# EAGLE board power_board (EAGLE 9.5.1)
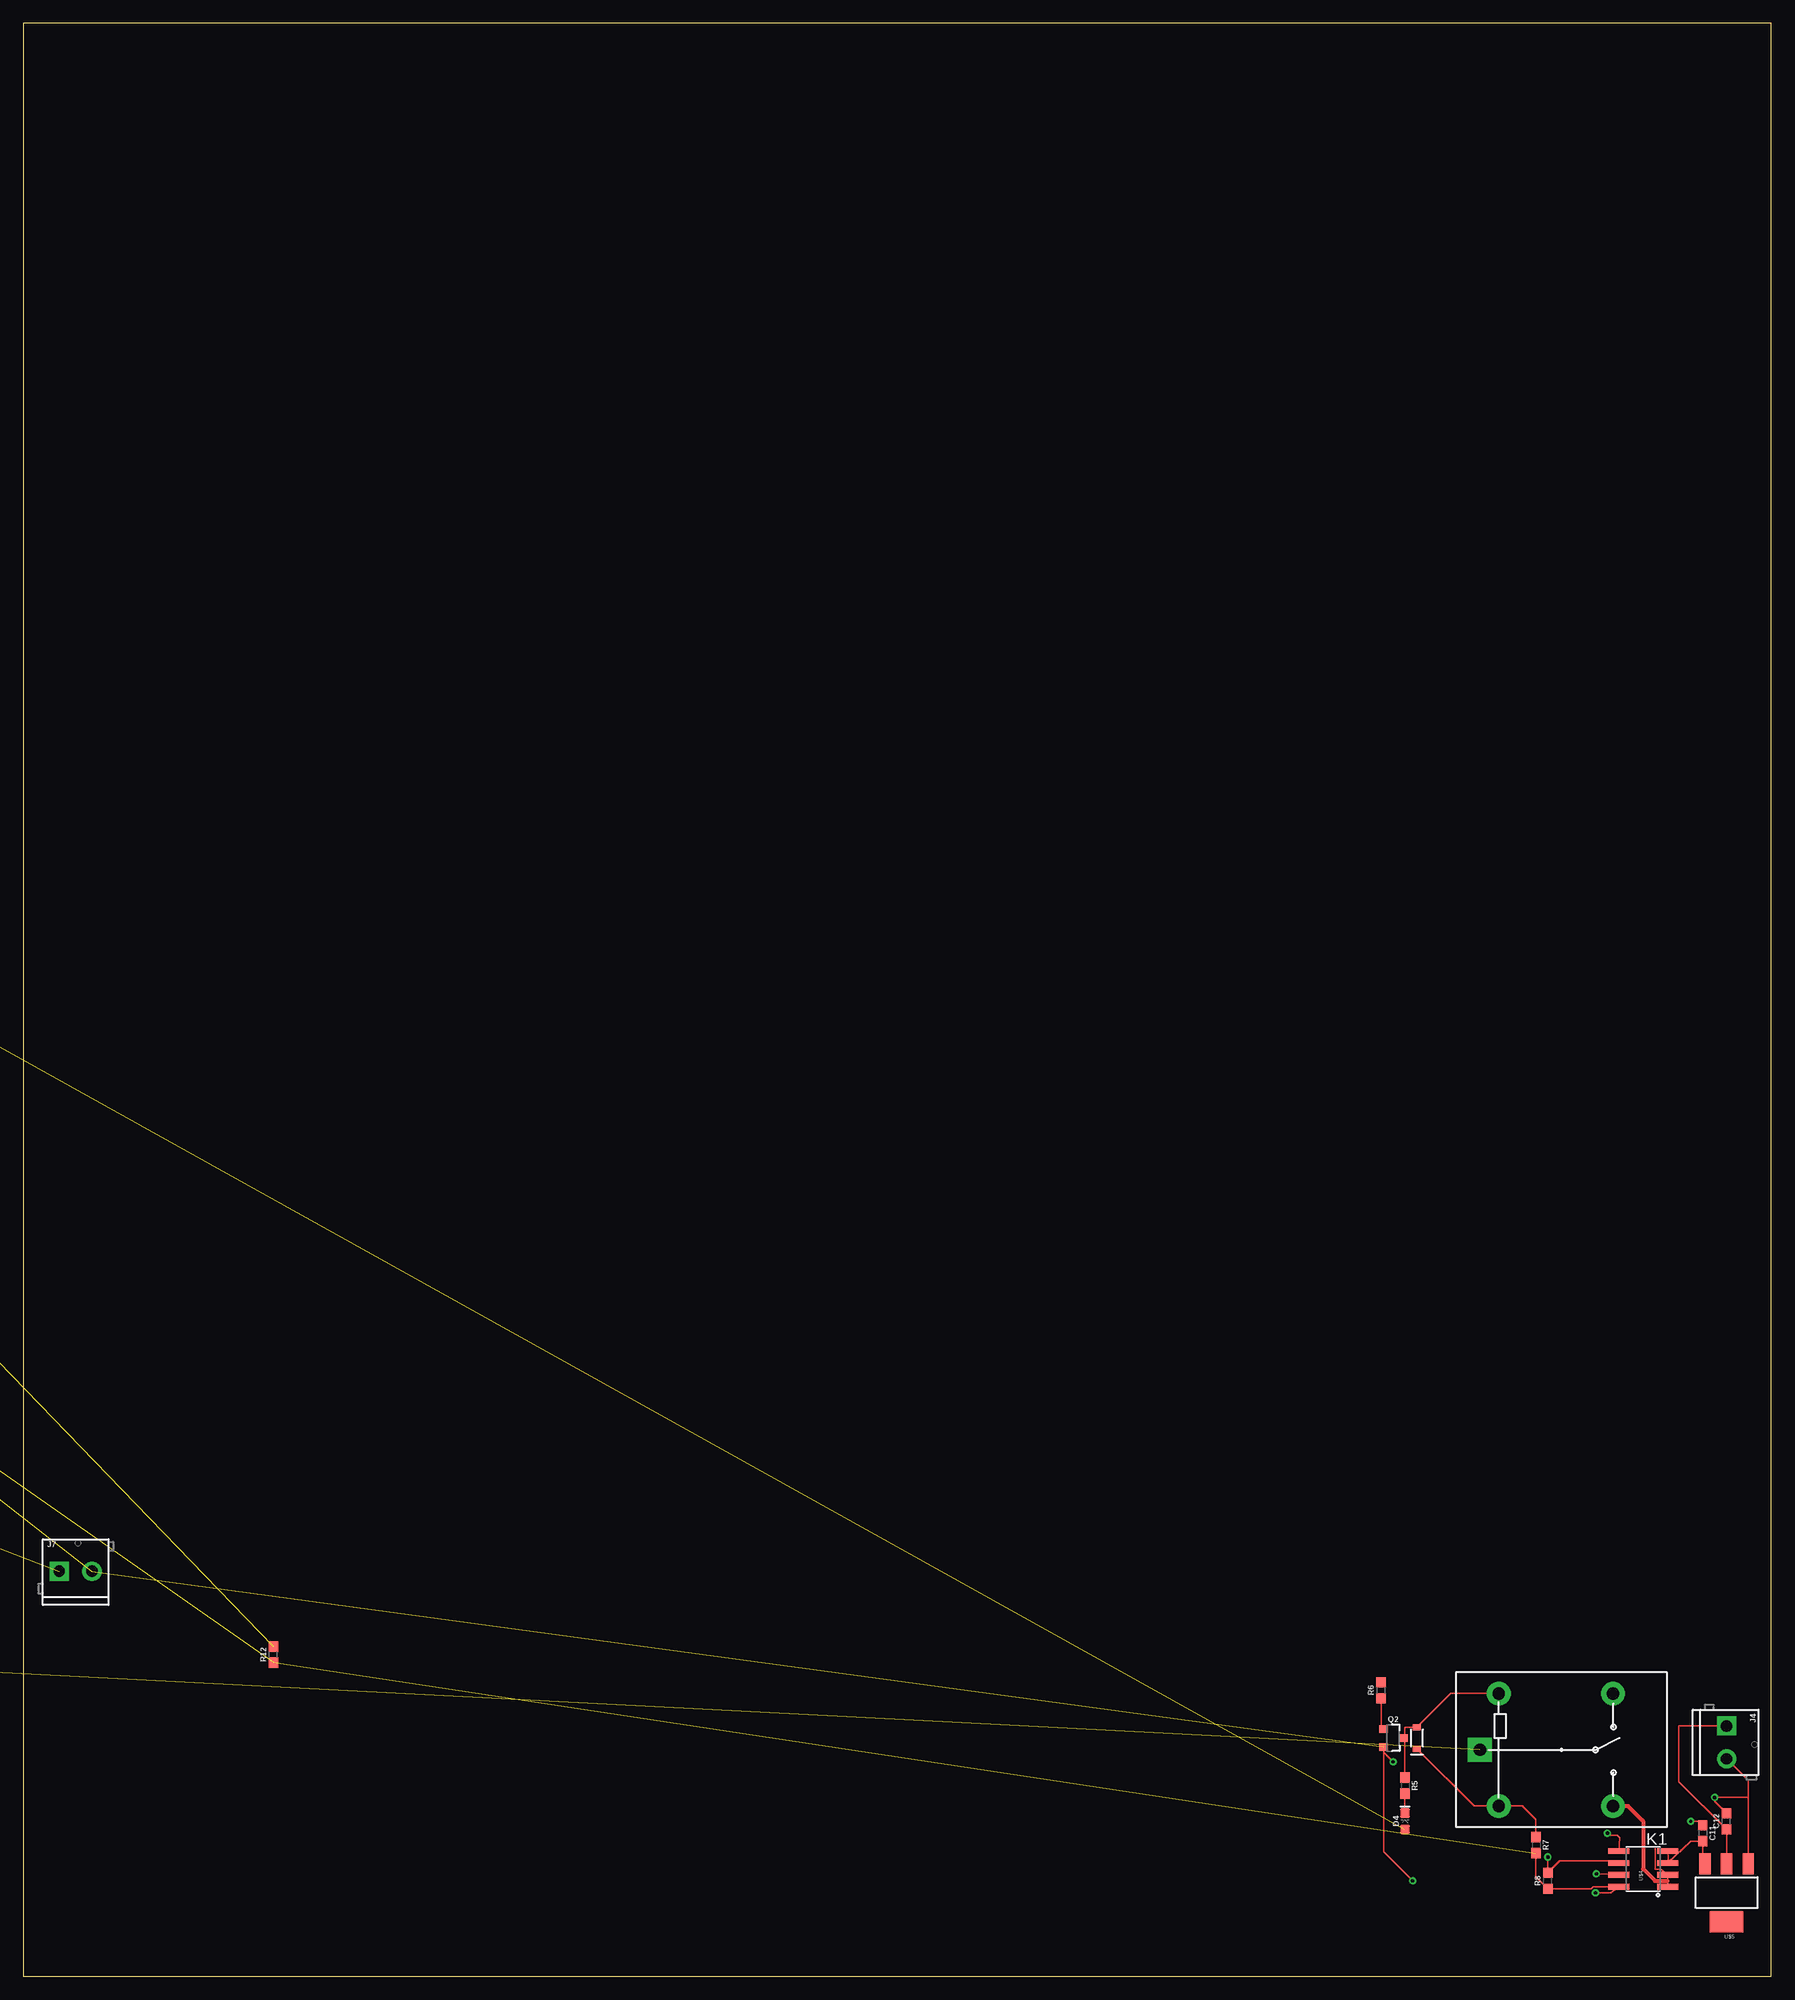
[diagram p0: board, top side]
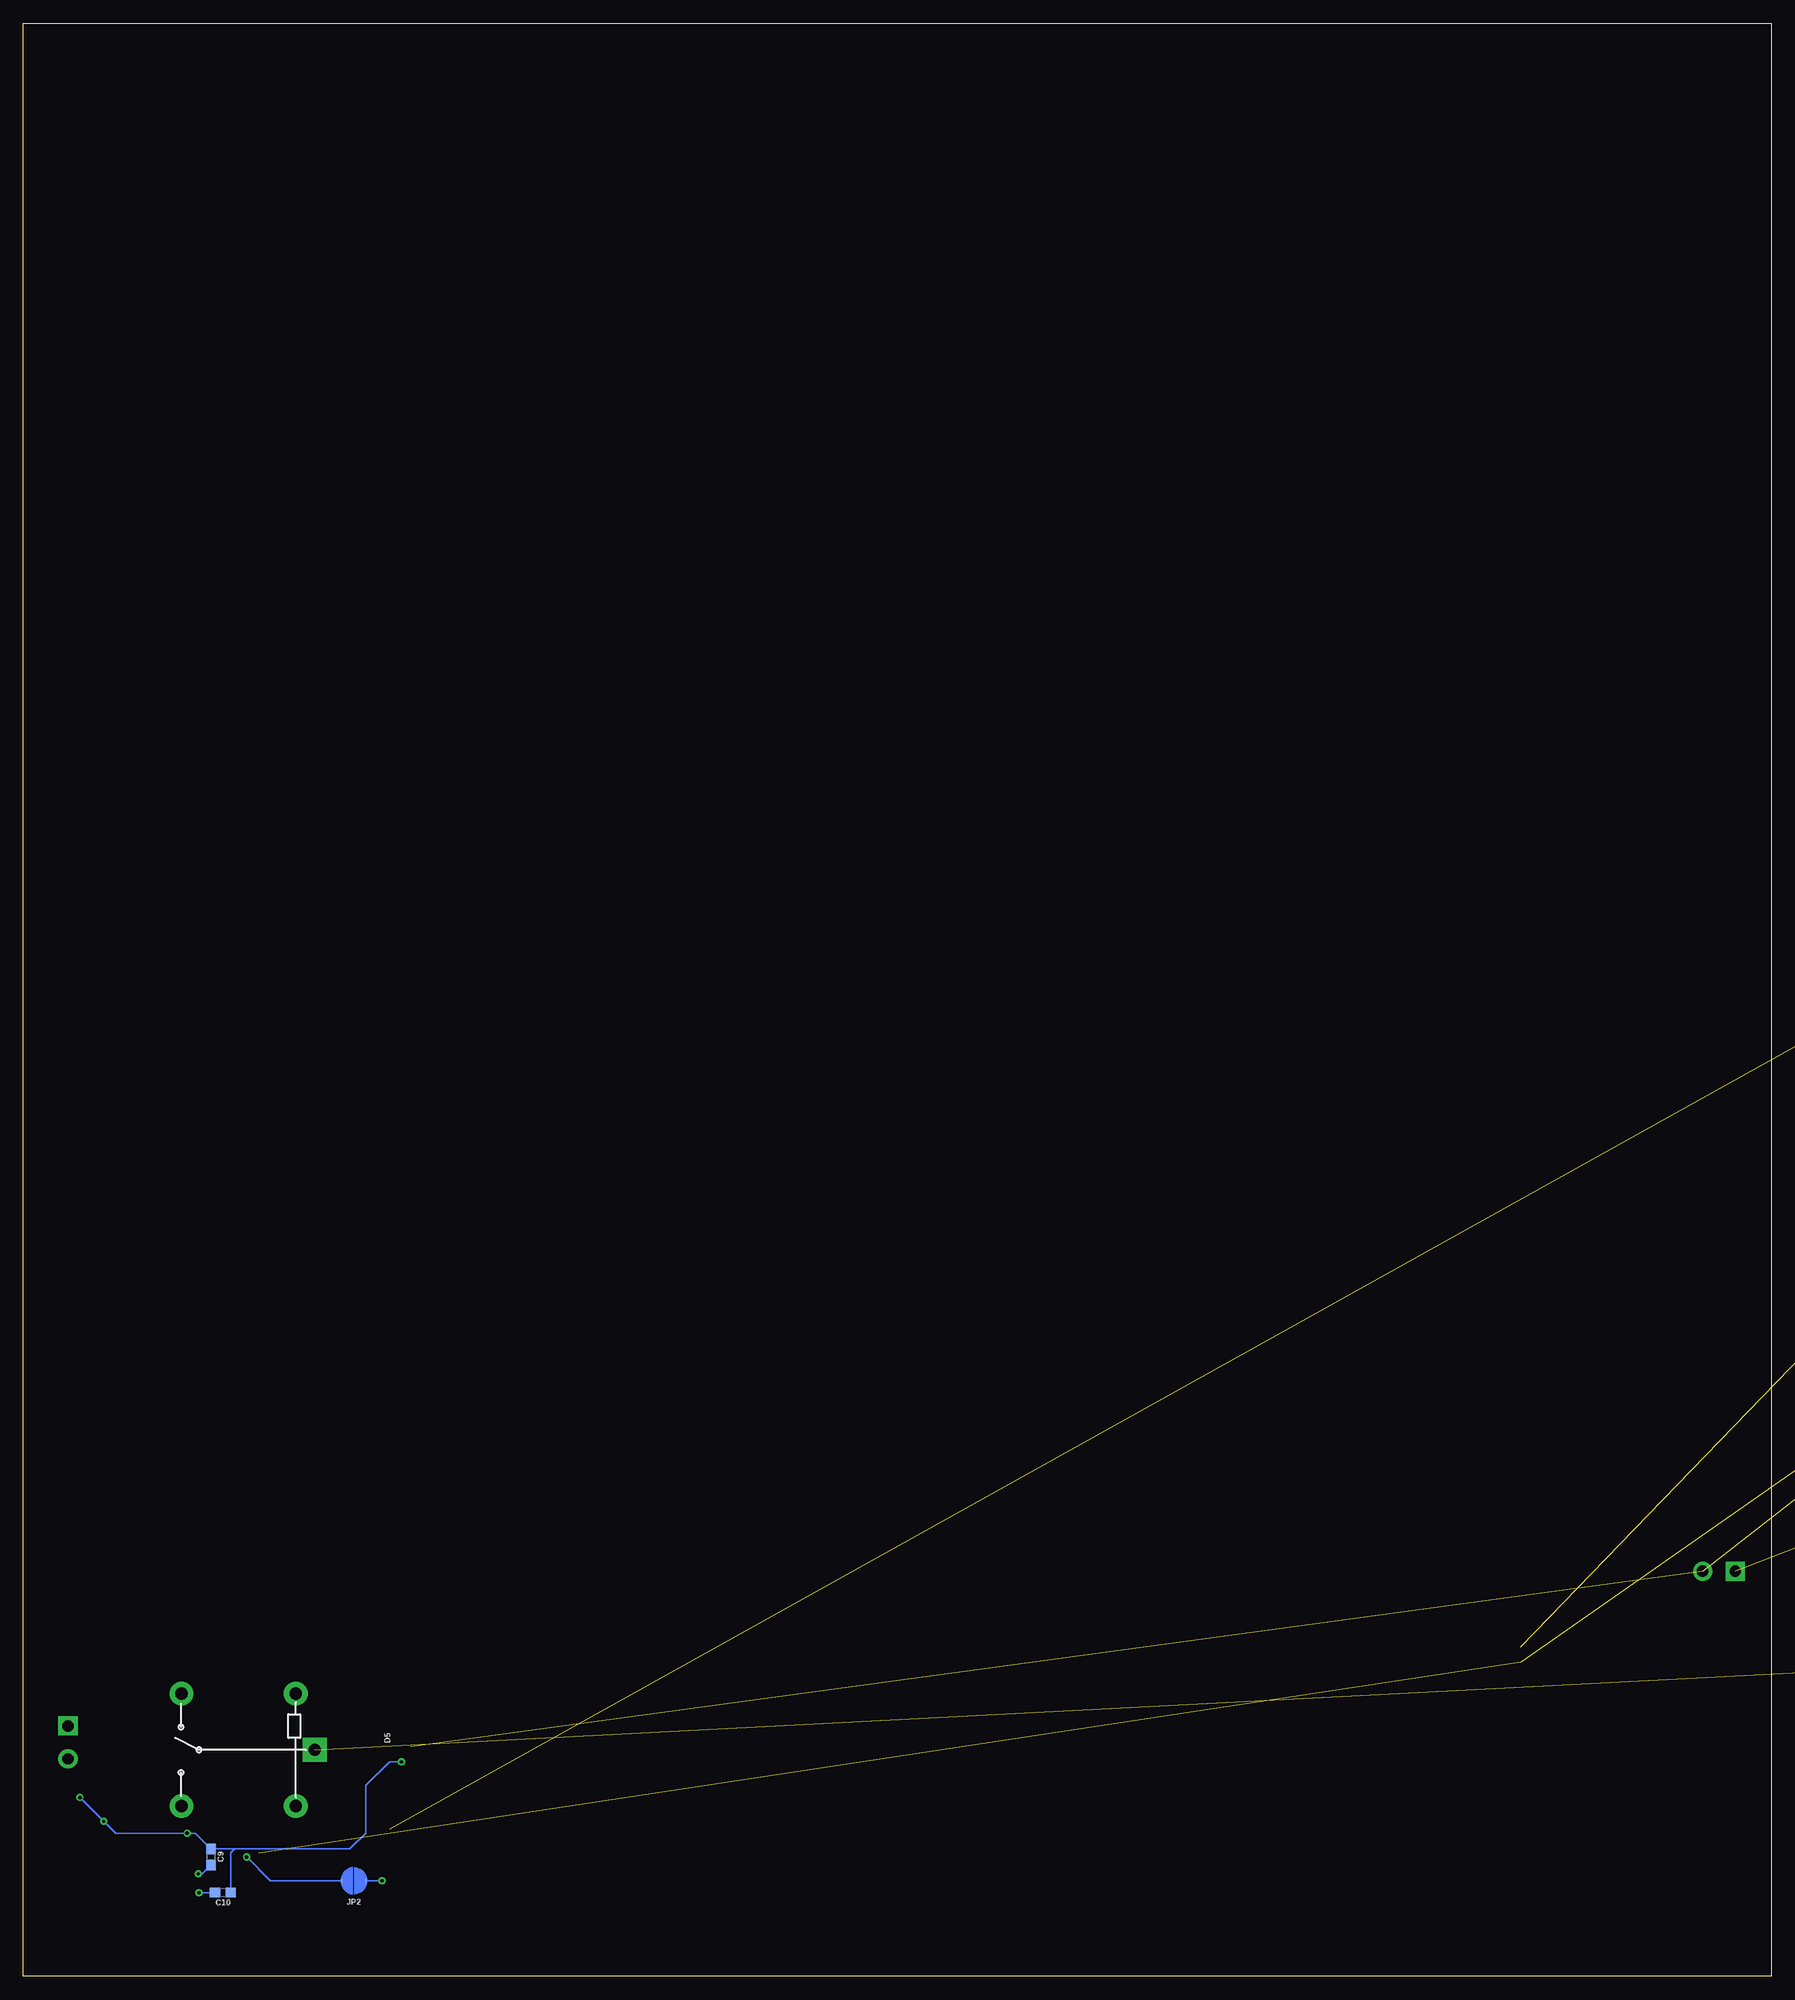
[diagram p1: board, bottom side, seen from below]

Size 186.36 x 208.27 mm. Coordinates in mm from the lower left corner, seen from the top.
Outline: 0,0 186.36,0 186.36,208.27 0,208.27 0,0
Copper layers (1*16): Top 0.035mm / dielectric 1.5mm / Bottom 0.035mm
Design rules "default": minimum track width 6mil, minimum drill 0.35mm, track to track 6mil, track to pad 6mil, pad to pad 6mil, via to via 6mil, smd to smd 6mil, copper to edge 40mil, drill to drill 6mil, minimum pad ring 10mil, minimum via ring 8mil, stop-mask expansion 4mil, vias tented up to drill 0mil, thermal gap 10mil

## Footprints (pad centres in the part's own frame; a part is rotated, then mirrored left to right if it is on the bottom)
0603 = smd 1.1 x 1: 1 -0.85,0; 2 0.85,0
0805 = smd 0.8 x 1.2: 1 -0.9,0; 2 0.9,0
LED-0603 = smd 1 x 1: A -0.877,0; C 0.877,0
SOD-323 = smd 0.63 x 0.83: A 1.15,0; C -1.15,0
PLCC-6-LED = smd 1.3 x 0.7: AB 1.475,1.1; AG 1.475,-1.1; AR 1.475,0; CB -1.475,1.1; CG -1.475,-1.1; CR -1.475,0
SCREWTERMINAL-3.5MM-2 = drill 1.2 pad 2.032 square: 1 0,0 | drill 1.2 pad 2.032: 2 3.5,0
1X01_2MM = drill 2 pad 3.302: 1 0,0
SMT-JUMPER_2_NO_NO-SILK_ROUND = smd 0.152 x 0.305: 1 -1.27,0; 2 1.27,0
RELAY_G5LE = drill 1.3 pad 2.54 square: 1 8.52,-0.005 | drill 1.3 pad 2.54: 2 6.52,5.995; 3 -5.68,5.995; 4 -5.68,-6.005; 5 6.52,-6.005
SOT23-3 = smd 0.8 x 0.9: 1 -0.95,-1; 2 0.95,-1; 3 0,1.1
TO-220-ALT = drill 1.016 long: GND 0,-3.81; IN -2.54,-3.81; OUT 2.54,-3.81 | hole 3.302: 0,11.176
TQFP-48 = smd 1.5 x 0.28: 1 -4.25,2.75; 2 -4.25,2.25; 3 -4.25,1.75; 4 -4.25,1.25; 5 -4.25,0.75; 6 -4.25,0.25; 7 -4.25,-0.25; 8 -4.25,-0.75; 9 -4.25,-1.25; 10 -4.25,-1.75; 11 -4.25,-2.25; 12 -4.25,-2.75; 25 4.25,-2.75; 26 4.25,-2.25; 27 4.25,-1.75; 28 4.25,-1.25; 29 4.25,-0.75; 30 4.25,-0.25; 31 4.25,0.25; 32 4.25,0.75; 33 4.25,1.25; 34 4.25,1.75; 35 4.25,2.25; 36 4.25,2.75 | smd 0.28 x 1.5: 13 -2.75,-4.25; 14 -2.25,-4.25; 15 -1.75,-4.25; 16 -1.25,-4.25; 17 -0.75,-4.25; 18 -0.25,-4.25; 19 0.25,-4.25; 20 0.75,-4.25; 21 1.25,-4.25; 22 1.75,-4.25; 23 2.25,-4.25; 24 2.75,-4.25; 37 2.75,4.25; 38 2.25,4.25; 39 1.75,4.25; 40 1.25,4.25; 41 0.75,4.25; 42 0.25,4.25; 43 -0.25,4.25; 44 -0.75,4.25; 45 -1.25,4.25; 46 -1.75,4.25; 47 -2.25,4.25; 48 -2.75,4.25
NINA112-42 = smd 0.7 x 1.15: 1 -4.5,-4.125; 2 -3.5,-4.125; 3 -2.5,-4.125; 4 -1.5,-4.125; 5 -0.5,-4.125; 6 0.5,-4.125; 7 1.5,-4.125; 8 2.5,-4.125; 9 3.5,-4.125; 10 4.5,-4.125; 16 4.5,4.125; 17 3.5,4.125; 18 2.5,4.125; 19 1.5,4.125; 20 0.5,4.125; 21 -0.5,4.125; 22 -1.5,4.125; 23 -2.5,4.125; 24 -3.5,4.125; 25 -4.5,4.125 | smd 1.15 x 0.7: 11 4.425,-2; 12 4.425,-1; 13 4.425,0; 14 4.425,1; 15 4.425,2; 26 -4.425,2; 27 -4.425,1; 28 -4.425,0; 29 -4.425,-1; 30 -4.425,-2 | smd 0.7 x 0.7: 31 -1.725,-0.575; 32 -1.725,0.575; 33 -0.575,-1.725; 34 -0.575,-0.575; 35 -0.575,0.575; 36 -0.575,1.725; 37 0.575,-0.575; 38 0.575,0.575; 39 1.725,-1.725; 40 1.725,-0.575; 41 1.725,0.575; 42 1.725,1.725
SO16 = smd 0.6 x 1.2: 1 -4.445,-2.8; 2 -3.175,-2.8; 3 -1.905,-2.8; 4 -0.635,-2.8; 5 0.635,-2.8; 6 1.905,-2.8; 7 3.175,-2.8; 8 4.445,-2.8; 9 4.445,2.8; 10 3.175,2.8; 11 1.905,2.8; 12 0.635,2.8; 13 -0.635,2.8; 14 -1.905,2.8; 15 -3.175,2.8; 16 -4.445,2.8
SO08 = smd 0.61 x 2.21: 1 -1.905,-2.616; 2 -0.635,-2.616; 3 0.635,-2.616; 4 1.905,-2.616; 5 1.905,2.616; 6 0.635,2.616; 7 -0.635,2.616; 8 -1.905,2.616
SOT223 = smd 1.219 x 2.235: 1 -2.311,-3.099; 2 0,-3.099; 3 2.311,-3.099 | smd 3.6 x 2.2: 4 0,3.099

## Placement (x,y rotation side)
C1  1nF  [0603]  -59.69,95.25 0 top  (outside the outline)
C2  0.1uF  [0603]  -63.5,95.25 0 top  (outside the outline)
C3  10uF  [0603]  -67.31,95.25 0 top  (outside the outline)
C4  10uF  [0603]  -71.12,95.25 0 top  (outside the outline)
C5  10uF  [0603]  -74.93,95.25 0 top  (outside the outline)
C6  10uF  [0603]  -78.74,95.25 0 top  (outside the outline)
C7  0.33µF  [0805]  -86.36,88.9 0 top  (outside the outline)
C8  0.1uF  [0603]  -82.55,95.25 0 top  (outside the outline)
C9  1nF  [0603]  166.37,12.7 270 bottom
C10  0.1uF  [0603]  165.1,8.89 180 bottom
C11  10uF  [0603]  179.07,15.24 270 top
C12  10uF  [0603]  181.61,16.51 90 top
C13  1nF  [0603]  -101.6,95.25 0 top  (outside the outline)
C14  0.1uF  [0603]  -105.41,95.25 0 top  (outside the outline)
C15  10uF  [0603]  -15.24,99.06 0 top  (outside the outline)
C16  10uF  [0603]  -19.05,99.06 0 top  (outside the outline)
C17  1nF  [0603]  -22.86,99.06 0 top  (outside the outline)
C18  0.1uF  [0603]  -26.67,99.06 0 top  (outside the outline)
C19  1nF  [0603]  -30.48,99.06 0 top  (outside the outline)
C20  0.1uF  [0603]  -34.29,99.06 0 top  (outside the outline)
C21  1nF  [0603]  -38.1,99.06 0 top  (outside the outline)
C22  0.1uF  [0603]  -41.91,99.06 0 top  (outside the outline)
C23  10uF  [0603]  -45.72,99.06 0 top  (outside the outline)
C24  10uF  [0603]  -49.53,99.06 0 top  (outside the outline)
C25  1nF  [0603]  -53.34,99.06 0 top  (outside the outline)
C26  0.1uF  [0603]  -57.15,99.06 0 top  (outside the outline)
C27  1nF  [0603]  -60.96,99.06 0 top  (outside the outline)
C28  0.1uF  [0603]  -64.77,99.06 0 top  (outside the outline)
D1  Red  [LED-0603]  -95.25,102.87 0 top  (outside the outline)
D2  1A/23V/620mV  [SOD-323]  -91.44,88.9 0 top  (outside the outline)
D3  RGB  [PLCC-6-LED]  -31.75,90.17 0 top  (outside the outline)
D4  Red  [LED-0603]  147.32,16.51 90 top
D5  1A/23V/620mV  [SOD-323]  148.59,25.4 90 top
D6  Red  [LED-0603]  -102.87,102.87 0 top  (outside the outline)
D7  1A/23V/620mV  [SOD-323]  -16.51,95.25 0 top  (outside the outline)
D8  Red  [LED-0603]  -106.68,102.87 0 top  (outside the outline)
D9  1A/23V/620mV  [SOD-323]  -24.13,95.25 0 top  (outside the outline)
D10  Red  [LED-0603]  -15.24,106.68 0 top  (outside the outline)
D11  1A/23V/620mV  [SOD-323]  -31.75,95.25 0 top  (outside the outline)
D12  Red  [LED-0603]  -19.05,106.68 0 top  (outside the outline)
D13  1A/23V/620mV  [SOD-323]  -39.37,95.25 0 top  (outside the outline)
D14  Red  [LED-0603]  -22.86,106.68 0 top  (outside the outline)
D15  1A/23V/620mV  [SOD-323]  -46.99,95.25 0 top  (outside the outline)
D16  Red  [LED-0603]  -26.67,106.68 0 top  (outside the outline)
D17  1A/23V/620mV  [SOD-323]  -54.61,95.25 0 top  (outside the outline)
J1  [SCREWTERMINAL-3.5MM-2]  -78.74,68.58 0 top  (outside the outline)
J2  [1X01_2MM]  -77.47,88.9 0 top  (outside the outline)
J3  [1X01_2MM]  -82.55,88.9 0 top  (outside the outline)
J4  [SCREWTERMINAL-3.5MM-2]  181.61,26.67 270 top
J5  [SCREWTERMINAL-3.5MM-2]  -96.52,68.58 0 top  (outside the outline)
J6  [SCREWTERMINAL-3.5MM-2]  -105.41,68.58 0 top  (outside the outline)
J7  [SCREWTERMINAL-3.5MM-2]  3.81,43.18 0 top
J8  [SCREWTERMINAL-3.5MM-2]  -27.94,77.47 0 top  (outside the outline)
J9  [SCREWTERMINAL-3.5MM-2]  -36.83,77.47 0 top  (outside the outline)
J10  [SCREWTERMINAL-3.5MM-2]  -45.72,77.47 0 top  (outside the outline)
JP1  JUMPER-SMT_2_NO_NO-SILK_ROUND  [SMT-JUMPER_2_NO_NO-SILK_ROUND]  -71.12,77.47 0 top  (outside the outline)
JP2  JUMPER-SMT_2_NO_NO-SILK_ROUND  [SMT-JUMPER_2_NO_NO-SILK_ROUND]  151.13,10.16 180 bottom
JP3  JUMPER-SMT_2_NO_NO-SILK_ROUND  [SMT-JUMPER_2_NO_NO-SILK_ROUND]  -21.59,83.82 0 top  (outside the outline)
JP4  JUMPER-SMT_2_NO_NO-SILK_ROUND  [SMT-JUMPER_2_NO_NO-SILK_ROUND]  -38.1,83.82 0 top  (outside the outline)
JP5  JUMPER-SMT_2_NO_NO-SILK_ROUND  [SMT-JUMPER_2_NO_NO-SILK_ROUND]  -54.61,83.82 0 top  (outside the outline)
JP6  JUMPER-SMT_2_NO_NO-SILK_ROUND  [SMT-JUMPER_2_NO_NO-SILK_ROUND]  -71.12,83.82 0 top  (outside the outline)
JP7  JUMPER-SMT_2_NO_NO-SILK_ROUND  [SMT-JUMPER_2_NO_NO-SILK_ROUND]  -87.63,83.82 0 top  (outside the outline)
JP8  JUMPER-SMT_2_NO_NO-SILK_ROUND  [SMT-JUMPER_2_NO_NO-SILK_ROUND]  -21.59,90.17 0 top  (outside the outline)
K1  RELAY-SPDT  [RELAY_G5LE]  163.83,24.13 180 top
K2  RELAY-SPDT  [RELAY_G5LE]  -48.26,11.43 0 top  (outside the outline)
K3  RELAY-SPDT  [RELAY_G5LE]  -72.39,11.43 0 top  (outside the outline)
K4  RELAY-SPDT  [RELAY_G5LE]  -96.52,11.43 0 top  (outside the outline)
K5  RELAY-SPDT  [RELAY_G5LE]  -24.13,33.02 0 top  (outside the outline)
K6  RELAY-SPDT  [RELAY_G5LE]  -48.26,33.02 0 top  (outside the outline)
K7  RELAY-SPDT  [RELAY_G5LE]  -72.39,33.02 0 top  (outside the outline)
K8  RELAY-SPDT  [RELAY_G5LE]  -96.52,33.02 0 top  (outside the outline)
Q1  600mA/40V  [SOT23-3]  -36.83,90.17 0 top  (outside the outline)
Q2  600mA/40V  [SOT23-3]  146.05,25.4 270 top
Q3  600mA/40V  [SOT23-3]  -46.99,90.17 0 top  (outside the outline)
Q4  600mA/40V  [SOT23-3]  -52.07,90.17 0 top  (outside the outline)
Q5  600mA/40V  [SOT23-3]  -57.15,90.17 0 top  (outside the outline)
Q6  600mA/40V  [SOT23-3]  -62.23,90.17 0 top  (outside the outline)
Q7  600mA/40V  [SOT23-3]  -67.31,90.17 0 top  (outside the outline)
Q8  600mA/40V  [SOT23-3]  -72.39,90.17 0 top  (outside the outline)
R1  330  [0603]  -68.58,99.06 0 top  (outside the outline)
R2  330  [0603]  -72.39,99.06 0 top  (outside the outline)
R3  10  [0603]  -76.2,99.06 0 top  (outside the outline)
R4  4.7k  [0603]  -80.01,99.06 0 top  (outside the outline)
R5  330  [0603]  147.32,20.32 270 top
R6  330  [0603]  144.78,30.48 90 top
R7  10  [0603]  161.29,13.97 270 top
R8  4.7k  [0603]  162.56,10.16 90 top
R9  330  [0603]  -99.06,99.06 0 top  (outside the outline)
R10  330  [0603]  -102.87,99.06 0 top  (outside the outline)
R11  10  [0603]  -106.68,99.06 0 top  (outside the outline)
R12  4.7k  [0603]  26.67,34.29 90 top
R13  330  [0603]  -19.05,102.87 0 top  (outside the outline)
R14  330  [0603]  -22.86,102.87 0 top  (outside the outline)
R15  10  [0603]  -26.67,102.87 0 top  (outside the outline)
R16  4.7k  [0603]  -30.48,102.87 0 top  (outside the outline)
R17  330  [0603]  -34.29,102.87 0 top  (outside the outline)
R18  330  [0603]  -38.1,102.87 0 top  (outside the outline)
R19  10  [0603]  -41.91,102.87 0 top  (outside the outline)
R20  4.7k  [0603]  -45.72,102.87 0 top  (outside the outline)
R21  330  [0603]  -49.53,102.87 0 top  (outside the outline)
R22  330  [0603]  -53.34,102.87 0 top  (outside the outline)
R23  10  [0603]  -57.15,102.87 0 top  (outside the outline)
R24  4.7k  [0603]  -60.96,102.87 0 top  (outside the outline)
R25  330  [0603]  -64.77,102.87 0 top  (outside the outline)
R26  330  [0603]  -68.58,102.87 0 top  (outside the outline)
R27  10  [0603]  -72.39,102.87 0 top  (outside the outline)
R28  4.7k  [0603]  -76.2,102.87 0 top  (outside the outline)
R29  330  [0603]  -80.01,102.87 0 top  (outside the outline)
R30  330  [0603]  -83.82,102.87 0 top  (outside the outline)
R31  10  [0603]  -87.63,102.87 0 top  (outside the outline)
R32  4.7k  [0603]  -91.44,102.87 0 top  (outside the outline)
U1  [TO-220-ALT]  -46.99,49.53 0 top  (outside the outline)
U2  ATSAMD21G-A  [TQFP-48]  -74.93,50.8 0 top  (outside the outline)
U3  NINA-B112  [NINA112-42]  -62.23,52.07 0 top  (outside the outline)
U4  SN74HC595D  [SO16]  -55.88,77.47 0 top  (outside the outline)
U$1  ACS712  [SO08]  -25.4,68.58 0 top  (outside the outline)
U$2  3.3V Voltage Regulator  [SOT223]  -86.36,48.26 0 top  (outside the outline)
U$3  3.3V Voltage Regulator  [SOT223]  -95.25,48.26 0 top  (outside the outline)
U$4  ACS712  [SO08]  172.72,11.43 90 top
U$5  3.3V Voltage Regulator  [SOT223]  181.61,8.89 180 top
U$6  ACS712  [SO08]  -38.1,68.58 0 top  (outside the outline)
U$7  3.3V Voltage Regulator  [SOT223]  -19.05,68.58 0 top  (outside the outline)
U$8  ACS712  [SO08]  -44.45,68.58 0 top  (outside the outline)
U$9  ACS712  [SO08]  -50.8,68.58 0 top  (outside the outline)
U$10  ACS712  [SO08]  -57.15,68.58 0 top  (outside the outline)
U$11  3.3V Voltage Regulator  [TO-220-ALT]  -35.56,49.53 0 top  (outside the outline)
U$12  ACS712  [SO08]  -63.5,68.58 0 top  (outside the outline)
U$13  ACS712  [SO08]  -69.85,68.58 0 top  (outside the outline)

## Library data of the parts
C1 C9 C13 C17 C19 C21 C25 C27 = SparkFun-Capacitors; PROD_ID: CAP-07886
C2 C8 C10 C14 C18 C20 C22 C26 C28 = SparkFun-Capacitors; PROD_ID: CAP-00810
C3-C6 C11 C12 C15 C16 C23 C24 = SparkFun-Capacitors; PROD_ID: CAP-11015
C7 = SparkFun-Capacitors; PROD_ID: CAP-08469
D1 D4 D6 D8 D10 D12 D14 D16 = SparkFun-LED; PROD_ID: DIO-11154
D2 D5 D7 D9 D11 D13 D15 D17 = SparkFun-DiscreteSemi; PROD_ID: DIO-11623
D3 = SparkFun-LED; PROD_ID: DIO-12113
J1 J4-J10 = SparkFun-Connectors; PROD_ID: CONN-08399
J2 J3 = SparkFun-Connectors
JP1-JP8 = SparkFun-Jumpers
K1-K8 = SparkFun-Electromechanical; PROD_ID: COMP-14214
Q1-Q8 = SparkFun-DiscreteSemi; PROD_ID: TRANS-08049
R1 R2 R5 R6 R9 R10 R13 R14 R17 R18 R21 R22 R25 R26 R29 R30 = SparkFun-Resistors; PROD_ID: RES-00818
R3 R7 R11 R15 R19 R23 R27 R31 = SparkFun-Resistors; PROD_ID: RES-12581
R4 R8 R12 R16 R20 R24 R28 R32 = SparkFun-Resistors; PROD_ID: RES-07857
U1 U$11 = SparkFun-IC-Power; PROD_ID: VREG-08450; SF_ID: COM-00107
U2 = SparkFun-IC-Microcontroller; PROD_ID: IC-13064
U3 = ubloxLib
U4 = SparkFun-IC-Logic; PROD_ID: IC-07875
U$1 U$4 U$6 U$8-U$10 U$12 U$13 = SparkFun-Sensors; PROD_ID: IC-08964
U$2 U$3 U$5 U$7 = SparkFun-IC-Power; PROD_ID: VREG-13917

## Nets
3.3V: C6.1 D1.A D4.A D6.A D8.A D10.A D12.A D14.A D16.A U$3.2
5V: C2.2 C8.1 C10.2 C14.2 C18.2 C20.2 C22.2 C26.2 C28.2 R3.2 R4.1 R7.2 R8.1 R11.2 R12.1 R15.2 R16.1 R19.2 R20.1 R23.2 R24.1 R27.2 R28.1 R31.2 R32.1 U1.OUT U$1.8 U$4.8 U$6.8 U$8.8 U$9.8 U$10.8 U$12.8 U$13.8
12V: C5.2 C7.1 J2.1 K1.1 K2.1 K3.1 K4.1 K5.1 K6.1 K7.1 K8.1 U1.IN U$3.3
CTRL_1: R2.2
CTRL_2: R6.2
CTRL_4: R18.2
CTRL_5: R14.2
CTRL_6: R26.2
CTRL_7: R30.2
CTRL_8: R10.2 R22.2
CUR_1: C1.2 U$1.7
CUR_2: C9.2 U$4.7
CUR_3: C13.2 U$6.7
CUR_5: C17.2 U$8.7
CUR_6: C25.2 U$12.7
CUR_7: C21.2 C27.2 U$10.7 U$13.7
CUR_8: C19.2 U$9.7
GND: C1.1 C2.1 C3.1 C4.2 C5.1 C6.2 C7.2 C8.2 C9.1 C10.1 C11.1 C12.2 C13.1 C14.1 C15.1 C16.2 C17.1 C18.1 C19.1 C20.1 C21.1 C22.1 C23.1 C24.2 C25.1 C26.1 C27.1 C28.1 J1.2 J3.1 J4.2 J5.2 J6.2 J7.2 J8.2 J9.2 J10.2 JP1.1 JP2.1 JP3.1 JP4.1 JP5.1 JP6.1 JP7.1 JP8.1 Q1.2 Q2.2 Q3.2 Q4.2 Q5.2 Q6.2 Q7.2 Q8.2 U1.GND U3.6 U3.12 U3.14 U3.26 U3.30 U3.31 U3.32 U3.33 U3.34 U3.35 U3.36 U3.37 U3.38 U3.39 U3.40 U3.41 U3.42 U4.8 U$1.5 U$2.1 U$3.1 U$4.5 U$5.1 U$6.5 U$7.1 U$8.5 U$9.5 U$10.5 U$11.GND U$12.5 U$13.5
N$1: K2.3 U$1.1 U$1.2
N$2: C3.2 U$1.3 U$1.4 U$2.3
N$3: C4.1 J1.1 U$2.2
N$4: D2.A K2.5 Q1.3 R1.1
N$5: D2.C K2.2 R3.1
N$6: D1.C R1.2
N$7: JP1.2 R4.2 U$1.6
N$8: D5.A K1.5 Q2.3 R5.1
N$9: Q1.1 R2.1
N$10: D5.C K1.2 R7.1
N$11: D4.C R5.2
N$12: Q2.1 R6.1
N$13: C11.2 U$4.3 U$4.4 U$5.3
N$14: K1.3 U$4.1 U$4.2
N$15: JP2.2 R8.2 U$4.6
N$16: C12.1 J4.1 U$5.2
N$17: D7.A K3.5 Q3.3 R9.1
N$18: D7.C K3.2 R11.1
N$19: D6.C R9.2
N$20: Q3.1 R10.1
N$21: C15.2 U$6.3 U$6.4 U$7.3
N$22: K3.3 U$6.1 U$6.2
N$23: JP3.2 R12.2 U$6.6
N$24: C16.1 J5.1 U$7.2
N$25: D9.A K4.5 Q4.3 R13.1
N$26: J7.1 U$10.3 U$10.4
N$27: D9.C K4.2 R15.1
N$28: D8.C R13.2
N$29: Q4.1 R14.1
N$30: K4.3 U$8.1 U$8.2
N$31: JP4.2 R16.2 U$8.6
N$32: J6.1 U$8.3 U$8.4
N$33: D11.A K5.5 Q5.3 R17.1
N$34: D11.C K5.2 R19.1
N$35: D10.C R17.2
N$36: Q5.1 R18.1
N$37: D13.A K6.5 Q6.3 R21.1
N$38: K5.3 U$10.1 U$10.2
N$39: JP5.2 R20.2 U$10.6
N$40: D13.C K6.2 R23.1
N$41: D12.C R21.2
N$42: Q6.1 R22.1
N$43: C23.2 U$9.3 U$9.4 U$11.IN
N$44: K6.3 U$9.1 U$9.2
N$45: JP6.2 R24.2 U$9.6
N$46: C24.1 J8.1 U$11.OUT
N$47: D15.A K7.5 Q7.3 R25.1
N$48: D15.C K7.2 R27.1
N$49: D14.C R25.2
N$50: Q7.1 R26.1
N$51: K7.3 U$12.1 U$12.2
N$52: JP7.2 R28.2 U$12.6
N$53: J9.1 U$12.3 U$12.4
N$54: D17.A K8.5 Q8.3 R29.1
N$55: D17.C K8.2 R31.1
N$56: D16.C R29.2
N$57: Q8.1 R30.1
N$58: K8.3 U$13.1 U$13.2
N$59: JP8.2 R32.2 U$13.6
N$60: J10.1 U$13.3 U$13.4
VCC: U3.10 U4.16
VCC_IO: U3.9

## Tracks (layer width: path | path; a pad name or v marks a point on that pad's centre or on a via)
3.3V  (9 unrouted)
5V  (via drill 0.35)  (30 unrouted)
  Top 0.152: 162.9,9.65 R8.1 | R8.1 161.29,10.58 R7.2 | R8.1 167.2,9.31 167.39,9.5 169.86,9.5 U$4.8 169.26,8.89 v167.64,8.89
  Bottom 0.152: C10.2 v167.64,8.89
12V  (12 unrouted)
CTRL_8  (1 unrouted)
CUR_1  (1 unrouted)
CUR_2  (via drill 0.35)
  Top 0.152: U$4.7 v167.73,10.92
  Bottom 0.152: v167.73,10.92 167.3,10.92 C9.2
CUR_3  (1 unrouted)
CUR_5  (1 unrouted)
CUR_6  (1 unrouted)
CUR_7  (3 unrouted)
CUR_8  (1 unrouted)
GND  (via drill 0.35)  (76 unrouted)
  Top 0.152: U$4.5 170.2,14.73 169.93,14.99 169.16,14.99 v168.91,15.24 | v146.05,22.86 145.05,23.86 Q2.2 145.05,13.24 v148.13,10.16 | C11.1 178.65,16.51 v177.8,16.51 | C12.2 180.34,18.63 v180.34,19.05 183.92,19.05 | U$5.1 183.92,19.05 | 183.92,19.05 183.92,20.86 J4.2
  Bottom 0.152: 163.83,13.55 C9.1 168.06,15.24 v168.91,15.24 176.53,15.24 v177.8,16.51 v180.34,19.05 | 163.83,13.55 151.55,13.55 149.86,15.24 149.86,20.32 147.32,22.86 v146.05,22.86 | v148.13,10.16 JP2.1 | 163.83,13.55 164.25,13.13 C10.1
N$1  (2 unrouted)
N$2  (3 unrouted)
N$3  (2 unrouted)
N$4  (3 unrouted)
N$5  (2 unrouted)
N$6  (1 unrouted)
N$7  (2 unrouted)
N$8
  Top 0.152: K1.5 152.18,30.14 D5.A 147.32,26.55 147.32,25.28 | 147.32,25.28 147.27,25.28 Q2.3 | R5.1 147.32,25.28
N$9  (1 unrouted)
N$10
  Top 0.152: R7.1 161.29,16.69 161.28,16.7 159.85,18.14 K1.2 154.71,18.14 D5.C
N$11
  Top 0.152: D4.C R5.2
N$12
  Top 0.152: 144.73,26.67 144.75,26.64 | 144.75,26.64 Q2.1 | R6.1 144.78,26.67 144.75,26.64
N$13
  Top 0.152: U$5.3 179.07,12.22 C11.2 177.81,14.39 U$4.3 175.42,12 U$4.4
N$14
  Top 0.152: 174.01,13.63 174.01,11.38 174.59,11.38 U$4.2 175.32,10.16 175.3,9.46 U$4.1
  Top 0.406: K1.3 171.09,18.14 172.72,16.51 172.72,11.43 173.99,10.16 175.32,10.16
N$15  (via drill 0.35)
  Top 0.152: U$4.6 170.04,12.28 163.83,12.28 R8.2 v162.56,12.7
  Bottom 0.152: JP2.2 160.02,10.16 v162.56,12.7
N$16
  Top 0.152: U$5.2 C12.1 176.53,20.74 176.53,26.67 J4.1
N$17  (3 unrouted)
N$18  (2 unrouted)
N$19  (1 unrouted)
N$20  (1 unrouted)
N$21  (3 unrouted)
N$22  (2 unrouted)
N$23  (2 unrouted)
N$24  (2 unrouted)
N$25  (3 unrouted)
N$26  (2 unrouted)
N$27  (2 unrouted)
N$28  (1 unrouted)
N$29  (1 unrouted)
N$30  (2 unrouted)
N$31  (2 unrouted)
N$32  (2 unrouted)
N$33  (3 unrouted)
N$34  (2 unrouted)
N$35  (1 unrouted)
N$36  (1 unrouted)
N$37  (3 unrouted)
N$38  (2 unrouted)
N$39  (2 unrouted)
N$40  (2 unrouted)
N$41  (1 unrouted)
N$42  (1 unrouted)
N$43  (3 unrouted)
N$44  (2 unrouted)
N$45  (2 unrouted)
N$46  (2 unrouted)
N$47  (3 unrouted)
N$48  (2 unrouted)
N$49  (1 unrouted)
N$50  (1 unrouted)
N$51  (2 unrouted)
N$52  (2 unrouted)
N$53  (2 unrouted)
N$54  (3 unrouted)
N$55  (2 unrouted)
N$56  (1 unrouted)
N$57  (1 unrouted)
N$58  (2 unrouted)
N$59  (2 unrouted)
N$60  (2 unrouted)
VCC  (1 unrouted)